# Altium PCB diapers.PcbDoc
Units mm, origin at the board's own origin, x right, y up, seen from the top; angles counter-clockwise.
Board outline 53 x 32 mm, 2 copper layers (Top Layer, Bottom Layer); 42 components, 32 nets, 146 pads, 92 vias.
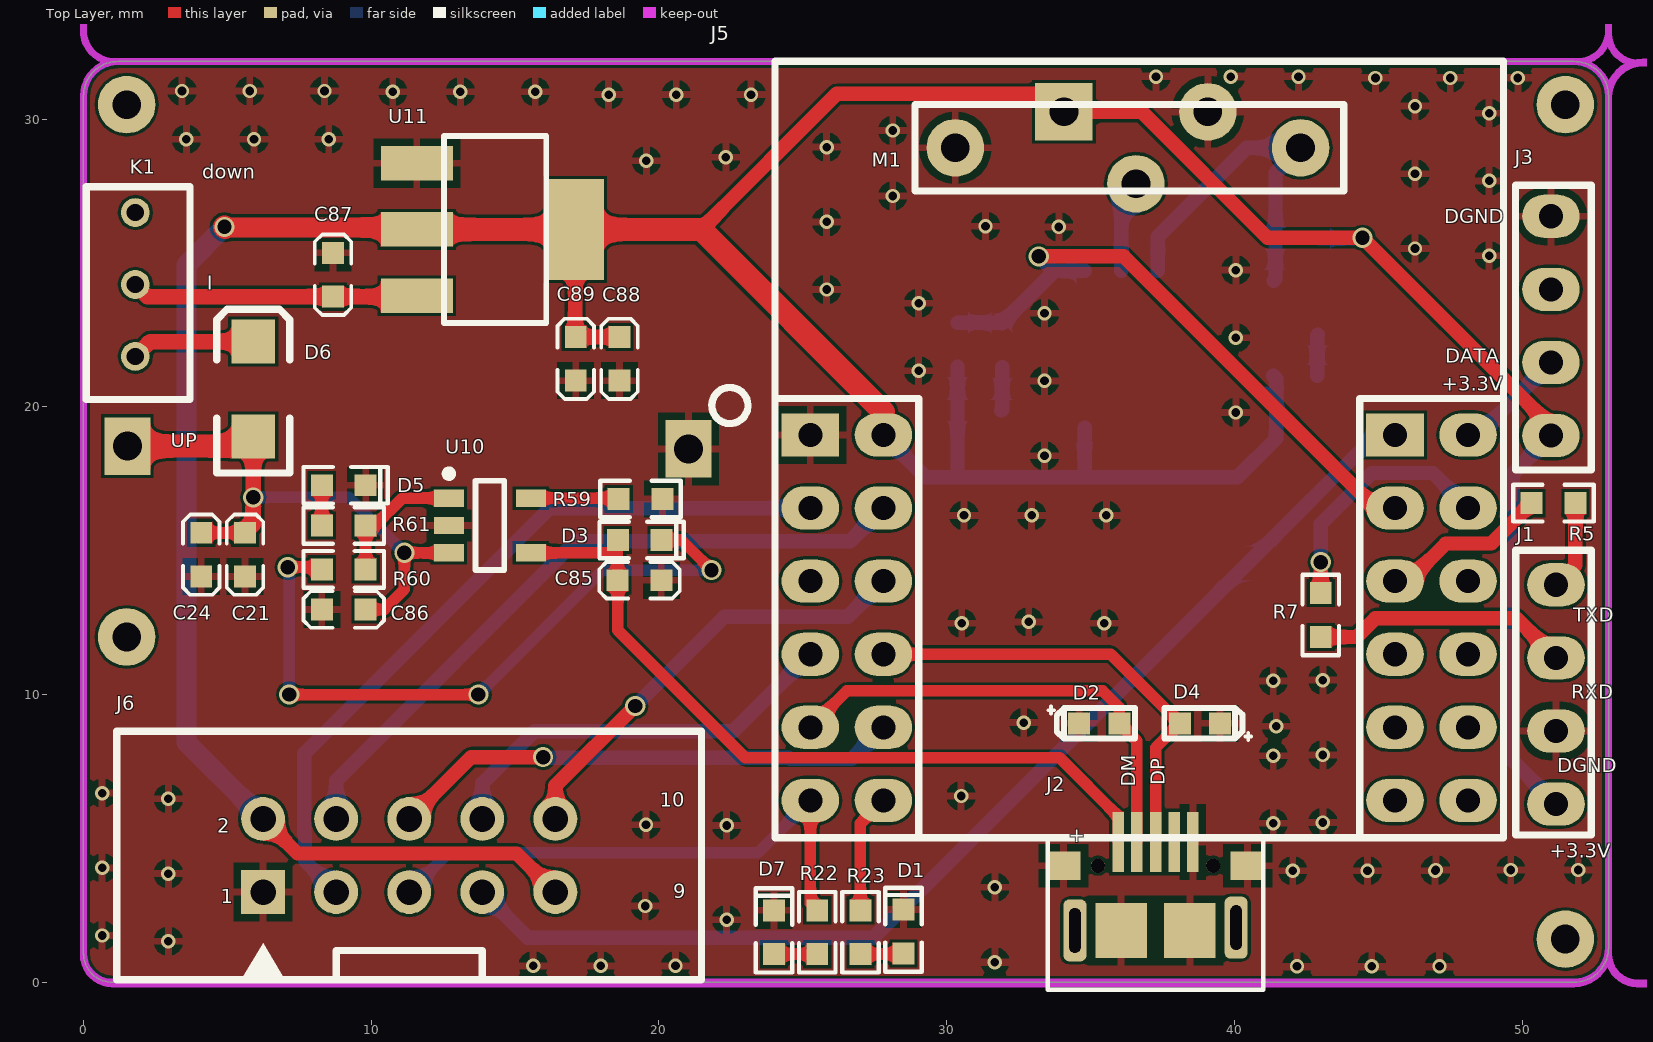
[diagram p0: Top Layer view]
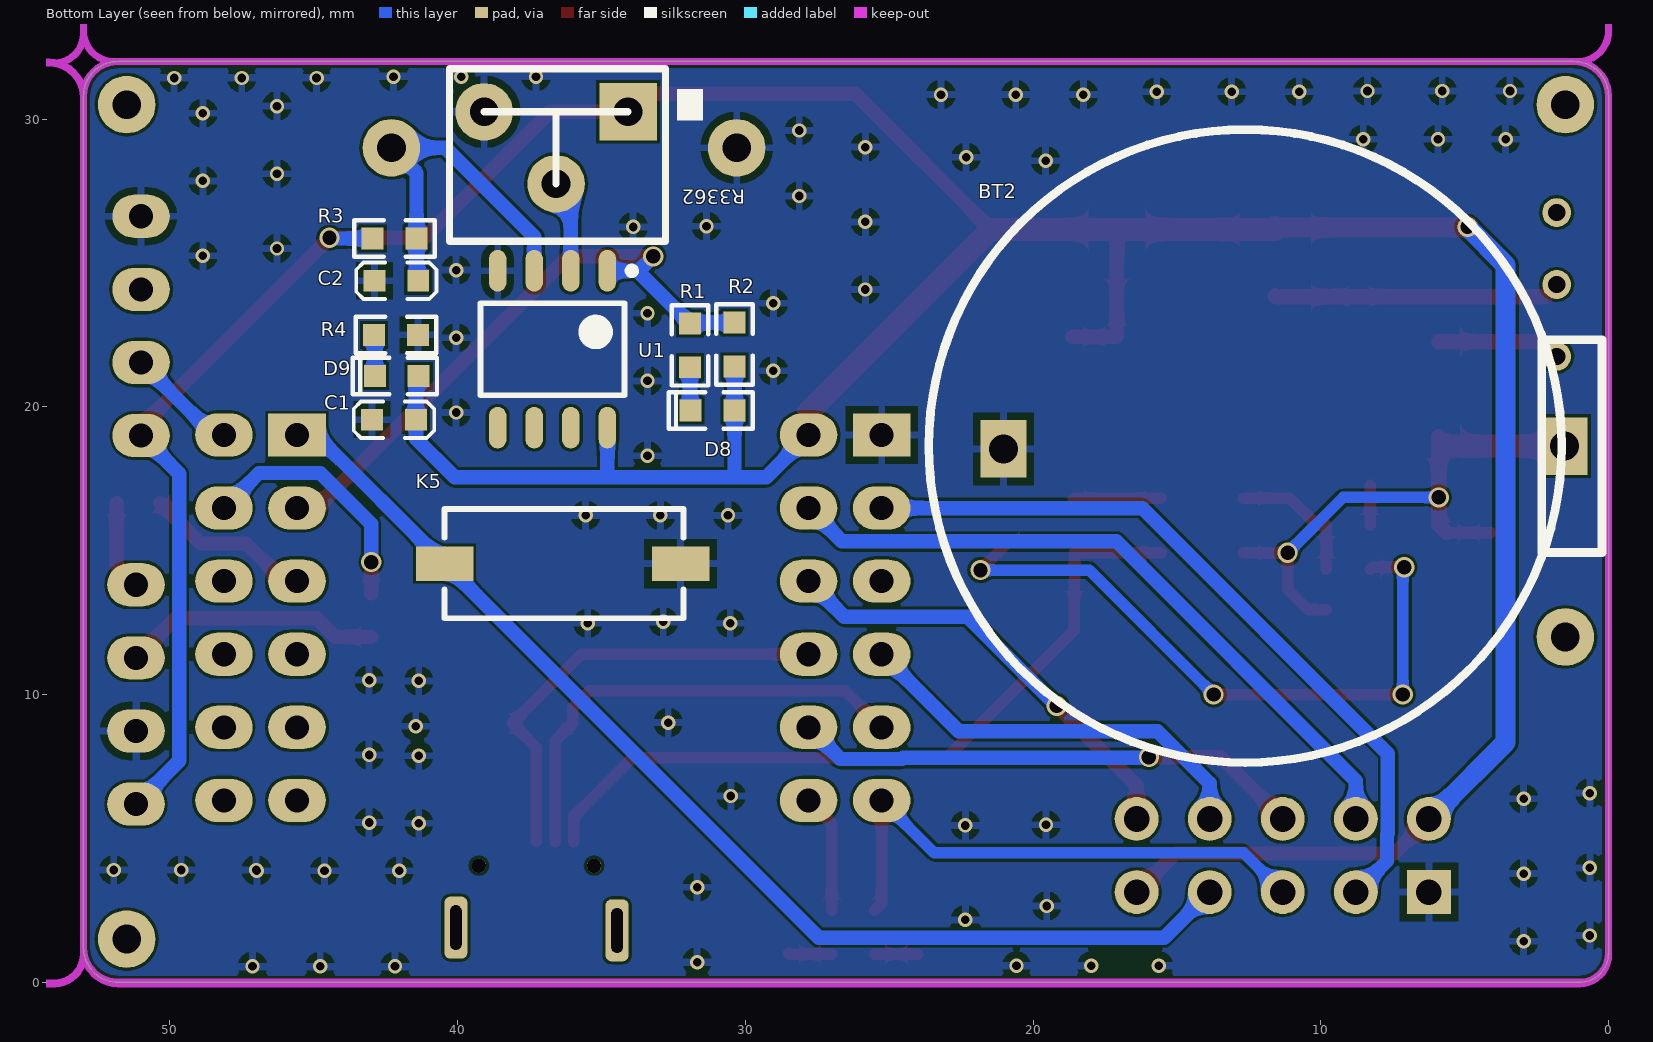
[diagram p1: Bottom Layer view, seen from below]
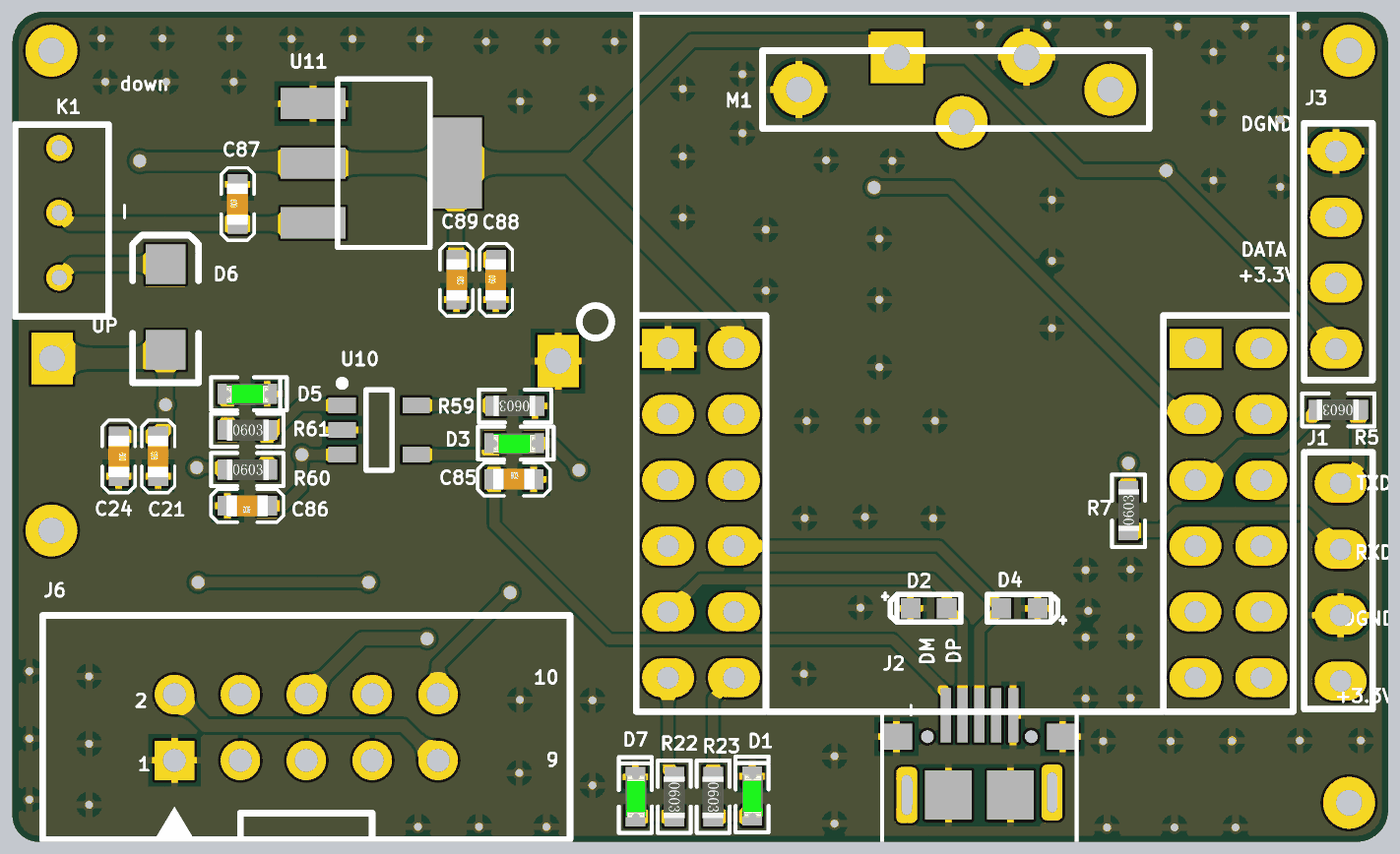
[diagram p2: 3D render of the assembled board from above, using the file's embedded part models]
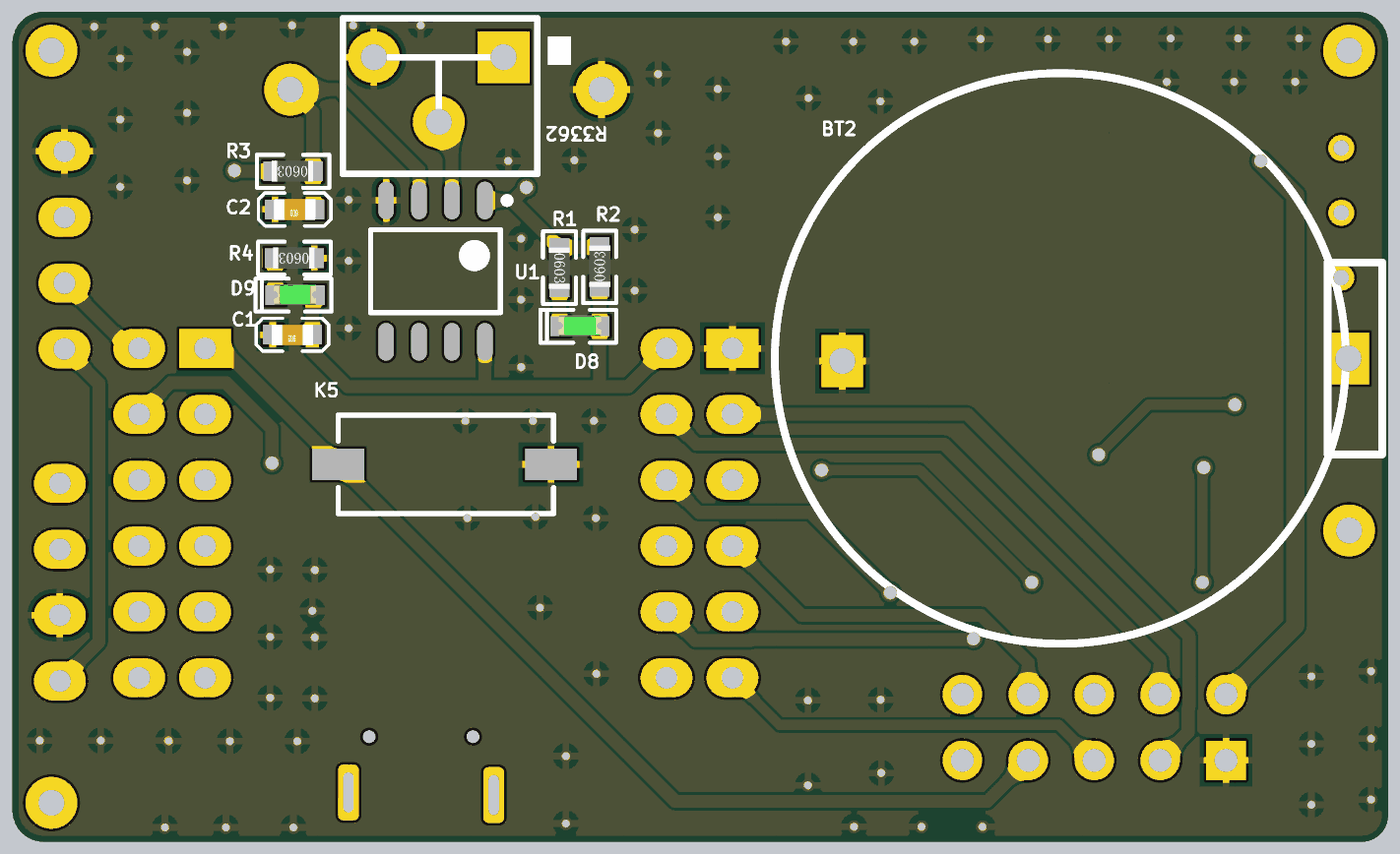
[diagram p3: 3D render of the assembled board from below, using the file's embedded part models]

## Layer stack, top to bottom
Top Solder: solder mask 0.0102, Solder Resist, Dk 3.5
Top Layer: signal copper 0.0356
Dielectric 1: dielectric 0.32, FR-4, Dk 4.8
Bottom Layer: signal copper 0.0356
Bottom Solder: solder mask 0.0102, Solder Resist, Dk 3.5

## Board outline
0,1 ccw(c1,1) 1,0 51.8,0 ccw(c51.8,1.2) 53,1.2 53,30.8 ccw(c51.8,30.8) 51.8,32 1.2,32 ccw(c1.2,30.8) 0,30.8

## Design rules (kind name [scope] priority, off if disabled: settings)
Clearance [All] p1: gap=0.1
PolygonConnect [All] p1: connectstyle=Relief reliefconductorwidth=0.254 reliefentries=4 polygonreliefangle="90 Angle" airgapwidth=0.254
RoutingVias [All] p1: holewidth=0.3 width=0.5 viastyle="Through Hole" minholewidth=0.3 minwidth=0.5 maxholewidth=0.5 maxwidth=0.7
SolderMaskExpansion [All] p1: expansion=0.102
Width [All] p1: maxlimit=10 minlimit=0.1 preferedwidth=0.5
30 further rules are at their usual default settings.

## Components (designator, comment, footprint, x,y, rotation, side; value= is the part's Value field where it differs from the comment)
BT2 "Li-battery" LIR2032 1.525,18.634 r90 bottom
C1 "104K50V" C0603 41.45,19.55 r0 bottom
C2 "104K50V" C0603 41.365,24.38 r0 bottom
C21 "104K50V" C0603 5.616,14.097 r90 top
C24 "106K50V" C0603 4.092,15.621 r270 top
C85 "475K16V" C0603 18.557,13.97 r0 top
C86 "106K50V" C0603 9.807,12.954 r180 top
C87 "104K50V" C0603 8.675,23.826 r90 top
C88 "106K50V" C0603 18.631,20.906 r90 top
C89 "104K50V" C0603 17.107,22.43 r270 top
D1 "LED0603G" D-LED0603G 28.5,1 r90 top
D2 "ESDA_TR1/0603" HS_0603D 35.301,9 r0 top
D3 "LED0603G" D-LED0603G 18.57,15.367 r0 top
D4 "ESDA_TR1/0603" HS_0603D 38.801,9 r180 top
D5 "LED0603G" D-LED0603G 8.283,17.272 r0 top
D6 "500mA/13.2V" D1206 5.9,18.966 r90 top
D7 "LED0603G" D-LED0603G 24,0.976 r90 top
D8 "LED0603G" D-LED0603G 30.375,19.875 r0 bottom
D9 "LED0603G" D-LED0603G 41.35,21.075 r0 bottom
J1 "J-D2.45-1*4" D2.54-1*4P 51.175,13.815 r270 top
J2 "USB-MINI-SOCKET" "MICRO-USB - 5.9" 35.957,4.875 r0 top
J3 "J-D2.45-1*4" D2.54-1*4P 51,19 r90 top
J5 "CC2540" CC2540 24.03,5.02 r0 top
J6 "DC3-2.54-2X5P" DC3-2.54-2X5P 6.24,3.135 r0 top
K1 "SS-12D00" SS-12D00 1.8,26.75 r270 top
K5 "3*6*5" S-K3*6 40.45,14.55 r90 bottom
M1 "SW420" SW420 42.3,29 r180 top
R1 "1KF" R0603 31.925,22.899 r270 bottom
R2 "10KF" R0603 30.375,21.401 r90 bottom
R3 "10KF" R0603 41.425,25.85 r0 bottom
R4 "1KF" R0603 41.375,22.5 r0 bottom
R5 "22RF" R0603 51.85,16.65 r180 top
R7 "22RF" R0603 43,12 r90 top
R22 "3KF" R0603 25.5,2.5 r270 top
R23 "3KF" R0603 27,2.5 r270 top
R59 "R0603-15KF" R0603 20.124,16.8 r180 top
R60 "470RF" R0603 8.283,14.351 r0 top
R61 "470RF" R0603 8.283,15.875 r0 top
R3362 "10k" R3326P 32.775,31.75 r0 bottom
U1 "LM393-DR" LM393 36.7,22 r270 bottom
U10 "MCP73831" SOT23-5N 14.125,15.875 r0 top
U11 "AMS1117_3.3V" SOT-223 11.585,26.162 r270 top

## Footprints (in the part's own frame and the unit in brackets; to place one, negate y for a bottom-side part, rotate by r counter-clockwise, add the part's x,y. Pads: shape width x height; smd on the part's side, far side on the other; paste and mask are expansions set on the pad)
C0603 [mil]
  rect 30x30 smd: 1(0,0) 2(60,0)
  silkscreen extent -25,-25 85,25, body extent -1,-15 61,16, height 12
CC2540 [mm]
  rect 2x1.5 hole 0.838: 1(1.23,14) 13(21.55,14)
  oval 2x1.5 hole 0.838: 2(3.77,14) 3(1.23,11.46) 4(3.77,11.46) 5(1.23,8.92) 6(3.77,8.92) 7(1.23,6.38) 8(3.77,6.38) 9(1.23,3.84) 10(3.77,3.84) 11(1.23,1.3) 12(3.77,1.3) 14(24.09,14) 15(21.55,11.46) 16(24.09,11.46) 17(21.55,8.92) 18(24.09,8.92) 19(21.55,6.38) 20(24.09,6.38) 21(21.55,3.84) 22(24.09,3.84) 23(21.55,1.3) 24(24.09,1.3)
  silkscreen extent -2.19,0 25.32,26.99, body extent 0,0 25.4,15.27, height 10
D2.54-1*4P [mm] "Bluetooth"
  oval 1.5x2 hole 0.838: 1(0,0) 2(2.54,0) 3(5.08,0) 4(7.62,0)
  silkscreen extent -1.2,-1.4 8.7,1.23, body extent -1.1,-1.4 8.7,1.23, height 10
D1206 [mil]
  rect 60x60 smd: 1(0,0) 2(130,0)
  silkscreen extent -50,-50 174,50, body extent -22,-40 151,40, height 47
D-LED0603G [mil]
  rect 30x30 smd: 1(0,0) 2(60,0)
  silkscreen extent -25,-25 90,25, body extent -2,-16 62,15, height 24
DC3-2.54-2X5P [mil] "DC3-2.54-2x5P直脚"
  rect 60x60 hole 35: 1(0,0)
  round 60 hole 35: 2(0,100) 3(100,0) 4(100,100) 5(200,0) 6(200,100) 7(300,0) 8(300,100) 9(400,0) 10(400,100)
  silkscreen extent -200,-120 600,220
HS_0603D [mil]
  rect 30x30 smd: 1(-27.5,0) 2(27.5,0)
  silkscreen extent -70,-21 49,23
LIR2032 [mm] "LIR2032 -- 2 Pin"
  rect 2x1.6 hole 1: 1(0,0) 2(-0.1,19.5)
  silkscreen extent -11,-1.3 11,22.1
LM393 [mm] "SOP, 8-Leads, Body 4.90x3.90mm, Pitch 1.27mm, IPC Medium Density"
  oval 1.45x0.6 smd: 1(-2.725,1.905) 2(-2.725,0.635) 3(-2.725,-0.635) 4(-2.725,-1.905) 5(2.725,-1.905) 6(2.725,-0.635) 7(2.725,0.635) 8(2.725,1.905)
  silkscreen extent -2.85,-2.5 1.6,2.88, body extent -2,-2.5 2,2.5, height 1.75
"MICRO-USB - 5.9" [mm]
  rrect50% 0.8x2.15 hole 0.4 slot 1.55 at 90 deg: 0(-1.5,-3.075) 0(4.1,-2.975)
  rect 0.4x2.1 smd: 1(0,0) 2(0.65,0) 3(1.3,0) 4(1.95,0) 5(2.6,0)
  rect 1.2x1 smd: 6(-1.9,-0.825) 7(4.5,-0.825)
  rect 1.8x1.9 smd: 8(0.106,-3.075) 9(2.493,-3.075)
  round 0.5 hole 0.5 unplated: ""(-0.7,-0.825) ""(3.3,-0.825)
  silkscreen extent -2.45,-5.13 5.05,0.12
R0603 [mil]
  rect 30x30 smd: 1(0,0) 2(60,0)
  silkscreen extent -25,-25 85,25, body extent 0,-16 62,15, height 18
R3326P [mm] "电位器精密可调电阻"
  rect 2x2 hole 1: 1(1.3,1.5)
  round 2 hole 1: 2(3.8,4) 3(6.3,1.5)
  silkscreen extent -1.3,0 7.5,6
S-K3*6 [mm]
  rect 1.2x2 smd: 1(0,0) 2(0,-8.2)
  silkscreen extent -1.9,-8.3 1.9,0
SOT23-5N [mm] "SOT23, 5-Leads, Body 2.90x2.70mm, Pitch 0.95mm, IPC Medium Density"
  rect 1.05x0.6 smd: 1(-1.425,0.95) 2(-1.425,0) 3(-1.425,-0.95) 4(1.425,-0.95) 5(1.425,0.95)
  silkscreen extent -1.55,-1.55 0.5,1.92, body extent -0.9,-1.55 0.9,1.55, height 1.45
SOT-223 [mm]
  rect 1.2x2.5 smd: 1(-2.3,0) 2(0,0) 3(2.3,0)
  rect 3.5x2 smd: 2(0,5.5)
  silkscreen extent -3.25,0.94 3.25,4.5
SS-12D00 [mm] "SS-12D00(1P2T) 立式 柄高5MM"
  round 1 hole 0.6: 1(0,0) 2(2.5,0) 3(5,0)
  silkscreen extent -0.9,-1.7 6.5,1.9
SW420 [mm] "常闭型 振动开关SW-420 高灵敏震动开关2708全方位感应传感器"
  round 2 hole 1: 1(0,0) 2(12,0)
  silkscreen extent -1.5,-1.5 13.4,1.5

## Part data
BT2: library part Li-batttery, "纽扣电池LIR2023"
C1 C2 C21 C87 C89: library part C0603X7R-104K50V, "贴片电容-陶瓷"
C24 C86 C88: library part C0603X7R-106K50V, "贴片电容-陶瓷"
C85: library part C0603X7R-475K16V, "贴片电容-陶瓷"
D1 D3 D5 D7 D8 D9: library part DLED-0603-G, "贴片二极管-LED"
D2 D4: library part "D Zener", "Zener Diode"
D6: library part 1206MSD, "500mA/13.2V 自恢复保险丝"
J1 J3: library part J-D2.54-1*4单排排母
J2: library part J-USB-MINI-SOCKET, "USB-A卧式插座"
J5: "蓝牙主控模块的接口"
J6: library part J-DC3-2.54-2X5P, "简牛插座-直针"
K1: library part "SS-12D00(1P2T) 立式 柄高5MM"
K5: "贴片-卧式轻触开关"
M1: "长闭震动开关"
R1 R4: library part R0603-1KF, "贴片电阻-通用"
R2 R3: library part R0603-10KF, "贴片电阻-通用"
R5 R7: library part R0603-22RF, "贴片电阻-通用"
R22 R23: library part R0603-3KF, "贴片电阻-通用"
R59: "贴片电容-通用"
R60 R61: library part R0603-470RF, "贴片电阻-通用"
R3362: library part R3362-10K, "电位器精密可调电阻"
U1: "双路比较器"
U10: "charge IC"
U11: library part AMS1117-3.3V

## Free pads (board coordinates)
  round 2 hole 1: 2(1.5,30.5) 3(1.5,12) 4(51.5,1.5) 5(51.5,30.5)

## Via types
v1: diameter 0.5, hole 0.3, Top Layer to Bottom Layer, tented both sides, 80 vias
v2: diameter 0.7, hole 0.5, Top Layer to Bottom Layer, tented both sides, 12 vias

## Nets (pads, with @x,y where several pads share a name; then routed paths per layer and width w, separated by ;. In a path a pad name is that pad's centre, name@x,y a point inside that pad or via, vN(x,y) a via of type N, cw(c..) or ccw(c..) an arc to the next point about the centre after c; other vN are vias at no path point)
+3.3V: C1.1 C88.2 C89.1 D8.1 D9.1 J1.4 J3.1 J5.2 J6.2 J6.9 R2.1 R3.2 R3362.1 U1.8 U11.2 | length 140.1
  Top Layer w0.5: J6.2 7.44,4.475 15.06,4.475 J6.9 ; U11.2@17.085,26.162 17.085,22.452 C89.1 C88.2 ; 21.463,26.162 26.176,30.875 34.075,30.875 R3362.1 36.775,30.25 41.15,25.875 v2(44.45,25.875) 51,19.325 J3.1
  Top Layer w0.7: v2@4.919,26.231 U11.2@11.585,26.231
  Top Layer w0.8: v2(4.9,26.25) v2@4.919,26.231 ; U11.2@11.585,26.231 11.585,26.162 17.085,26.162 21.463,26.162 27.8,19.825 J5.2
  Bottom Layer w0.5: J5.2 29.27,17.55 30.475,17.55 ; R2.1 D8.1 30.375,17.65 30.475,17.55 ; U1.8 34.795,17.705 34.95,17.55 ; D9.1 41.45,20.975 C1.1 41.45,18.9 40.1,17.55 34.95,17.55 ; R3.2 44.425,25.85 v2(44.45,25.875) ; J3.1 49.675,17.675 49.675,7.695 J1.4 ; 30.475,17.55 34.95,17.55
  Bottom Layer w0.7: v2(4.9,26.25) 3.575,24.925 3.575,8.34 5.875,6.04 J6.2@5.875,5.675
/CS: J5.11 J6.5 R22.1 | length 19.2
  Top Layer w0.4: J5.11 25.26,2.74 R22.1
  Bottom Layer w0.4: J6.5 12.685,4.5 23.44,4.5 J5.11
BT2: BT2.1 C21.2 C24.1 C86.1 D6.1 U10.3 | length 20
  Top Layer w0.4: C24.1 C21.2 C21.2@5.625,15.63 ; D6.1@5.625,18.691 D6.1 ; C86.1 10.454,12.954 11.15,13.65 v2(11.15,14.925) U10.3
  Top Layer w0.54: C21.2@5.625,15.63 5.9,15.905 v2(5.9,16.85) D6.1
  Top Layer w0.8: BT2.1 5.568,18.634 D6.1@5.625,18.691
  Bottom Layer w0.4: v2(5.9,16.85) 9.225,16.85 v2(11.15,14.925)
D0: J5.15 R1.1 R2.2 U1.1 | length 21.9
  Top Layer w0.5: v2(33.2,25.225) 36.15,25.225 44.895,16.48 J5.15
  Bottom Layer w0.5: R2.2 31.899,22.925 R1.1 33.751,24.725 ; v2(33.2,25.225) 33.7,24.725 33.751,24.725 ; U1.1 33.751,24.725
DATA: J3.2 J5.14 | length 3.9
  Bottom Layer w0.5: J5.14 48.48,19.02 J3.2
DBG_DC: J5.3 J6.3 | length 26.4
  Bottom Layer w0.5: J6.3 7.7,4.215 7.7,5.15 7.668,5.182 7.668,7.943 16.205,16.48 J5.3
DBG_DD: J5.4 J6.4 | length 24.3
  Bottom Layer w0.5: J6.4 8.78,7.005 17.1,15.325 26.645,15.325 J5.4
DGND: BT2.2 C1.2 C2.2 C21.1 C24.2 C85.2 C86.2 C87.2 C88.1 C89.2 D1.2 D2.1 D4.1 D5.2 D7.2 J1.3 J2.5 J2.6 J2.7 J2.8 J2.9 J3.4 J5.1 J6.1 K5.2 M1.2 R4.1 R59.1 R3362.3 U1.4 U10.2 U11.1
  other v1: 42.175,0.55 44.775,0.55 47.125,0.55 15.625,0.575 17.975,0.575 20.575,0.575 31.675,0.7 2.95,1.425 0.65,1.625 22.35,2.175 19.525,2.65 31.675,3.3 2.95,3.775 42.025,3.875 44.625,3.875 46.975,3.875 47,3.9 49.6,3.9 51.95,3.9 0.65,3.975 19.55,5.475 22.35,5.45 41.35,5.525 43.075,5.55 2.95,6.375 30.5,6.475 0.65,6.575 41.35,7.875 43.075,7.9 41.45,8.9 32.675,9.025 41.35,10.475 43.075,10.5 30.525,12.475 35.475,12.475 32.85,12.525 30.6,16.225 32.95,16.225 35.55,16.225 33.4,18.3 40.05,19.8 33.4,20.9 29.025,21.25 40.05,22.4 33.4,23.25 29.025,23.6 25.825,24.075 40.05,24.75 48.85,25.25 46.275,25.5 33.9,26.25 31.35,26.275 25.825,26.425 28.125,27.325 48.85,27.85 46.275,28.1 19.561,28.548 22.325,28.675 25.825,29.025 3.575,29.3 5.925,29.3 8.525,29.3 28.125,29.6 48.85,30.2 46.275,30.45 18.25,30.85 20.6,30.85 23.2,30.85 10.75,30.95 13.1,30.95 15.7,30.95 3.425,30.975 5.775,30.975 8.375,30.975 44.9,31.425 47.5,31.425 49.85,31.425 37.275,31.475 39.875,31.475 42.225,31.475
DIN: J5.7 J6.8 | length 14.5
  Bottom Layer w0.5: J6.8 13.86,6.91 15.675,8.725 22.585,8.725 J5.7
DM: D2.2 J2.2 J5.9 | length 16.4
  Top Layer w0.4: J5.9 26.525,10.125 35.425,10.125 36,9.55 D2.2 36.607,8.393 J2.2
DOUT: J5.6 J6.10 | length 15.5
  Top Layer w0.5: J6.10 16.4,6.825 v2(19.175,9.6) v2@19.175,9.575
  Bottom Layer w0.5: v2(19.175,9.6) 22.275,12.7 26.56,12.7 J5.6
DP: D4.2 J2.3 J5.8 | length 15.8
  Top Layer w0.4: J5.8 35.703,11.4 D4.2 37.257,8.154 J2.3
NetC2_1: C2.1 M1.1 R3.1 U1.3 | length 12.4
  Bottom Layer w0.5: U1.3 37.335,25.91 40.425,29 M1.1 41.425,28.125 R3.1 41.425,24.44 C2.1
NetD1_1: D1.1 R23.2 | length 1.5
  Top Layer w0.4: R23.2 28.476,0.976 D1.1
NetD3_2: D3.2 R60.1 | length 24.3
  Top Layer w0.4: v2(7.1,14.425) 8.209,14.425 R60.1 ; v2(7.15,10) v2(13.725,10) ; D3.2 20.783,15.367 v2(21.825,14.325)
  Bottom Layer w0.4: v2(7.1,14.425) 7.15,14.375 v2(7.15,10) ; v2(13.725,10) 18.05,14.325 v2(21.825,14.325)
NetD5_1: D5.1 R61.1 | length 1.4
  Top Layer w0.4: R61.1 D5.1
NetD6_2: D6.2 K1.3 | length 4.3
  Top Layer w0.54: K1.3 2.318,22.268 D6.2
NetD7_1: D7.1 R22.2 | length 1.5
  Top Layer w0.4: D7.1 R22.2
NetD8_2: D8.2 R1.2 | length 1.5
  Bottom Layer w0.5: D8.2 31.925,19.901 R1.2
NetD9_2: D9.2 R4.2 | length 1.4
  Bottom Layer w0.5: D9.2 42.874,22.475 R4.2
NetJ1_1: J1.1 R5.1 | length 3.1
  Top Layer w0.5: J1.1 51.85,14.49 R5.1
NetJ1_2: J1.2 R7.1 | length 9
  Top Layer w0.5: R7.1 44.25,12 44.9,12.65 49.8,12.65 J1.2
NetR59_2: R59.2 U10.5 | length 3.1
  Top Layer w0.4: U10.5 18.575,16.825 R59.2
NetR60_2: R60.2 R61.2 U10.1 | length 4.8
  Top Layer w0.4: R60.2 R61.2 10.125,15.875 11.075,16.825 U10.1
NetR3362_2: R3362.2 U1.2 | length 3.2
  Bottom Layer w0.5: U1.2 36.065,27.24 R3362.2
P13: J5.12 R23.1 | length 4.2
  Top Layer w0.4: R23.1 27,5.52 J5.12
RST: J5.13 J6.7 K5.1 | length 39.6
  Bottom Layer w0.5: J6.7 15.445,1.55 27.45,1.55 K5.1 44.92,19.02 J5.13
RXD: J5.16 R7.2 | length 8.8
  Top Layer w0.5: R7.2 v2(43,14.6)
  Bottom Layer w0.5: v2(43,14.6) 43,15.925 44.775,17.7 46.9,17.7 J5.16
SCLK: J5.10 J6.6 | length 17.9
  Top Layer w0.5: J6.6 13.47,7.825 v2(15.975,7.825)
  Bottom Layer w0.5: v2(15.975,7.825) 16,7.8 24.514,7.8 24.554,7.76 26.7,7.76 J5.10
TXD: J5.17 R5.2 | length 5.9
  Top Layer w0.5: J5.17 46.04,13.94 47.35,15.25 48.926,15.25 R5.2
VBUS: C85.1 D3.1 J2.1 U10.4 | length 26.7
  Top Layer w0.4: U10.4 18.532,14.925 18.557,14.95 C85.1 ; C85.1@18.57,13.97 18.57,12.23 23,7.8 33.925,7.8 35.957,5.768 J2.1
VIN: C87.1 K1.2 U11.3 | length 10
  Top Layer w0.54: K1.2 2.224,23.826 C87.1 11.549,23.826 U11.3
pads on no net: J2. J2.0 J2.4 J3.3 J5.5 J5.18 J5.19 J5.20 J5.21 J5.22 J5.23 J5.24 K1.1 U1.5 U1.6 U1.7

## Polygon pours and split planes (outlines as drawn)
DGND on Top Layer "gnd1" (solid, pour order 0): 0,31.975 0,0 52.975,0 52.975,31.9 52.9,31.975 0,31.975
DGND on Bottom Layer "gnd" (solid, pour order 2): 0,32 0,0 52.925,0 52.95,0.025 52.95,31.95 52.975,31.975 0.025,31.975 0,32

## Keep-outs
Keep-Out Layer:
  lines w0.25: 0,30.75 0,0.95 ccw(c1,0.95) 1,-0.05 51.8,-0.05 ccw(c51.8,1.15) 53,1.15 53,30.75 ; 0,32.975 0,62.775 cw(c1.2,62.775) 1.2,63.975 51.8,63.975 ; 53,33.15 53,62.75 ; 53,33.175 53,62.775 ccw(c51.8,62.775) 51.8,63.975 ; 0,0.975 ccw(c1,0.975) 1,-0.025 ; 0,0.975 ccw(c1,0.975) 1,-0.025 ; 0,0.975 0,30.775 0,0.975 ; 1,-0.025 51.8,-0.025 ; 1,-0.025 51.8,-0.025 ; 1.2,32 cw(c1.075,33.075) 0,32.95 0,62.75 cw(c1.2,62.75) 1.2,63.95 51.8,63.95 ; 1.2,32 ccw(c1.2,30.8) 0,30.8 0,1 ccw(c1,1) 1,0 51.8,0 ccw(c51.8,1.2) 53,1.2 53,30.8 ccw(c51.8,30.8) 51.8,32 ; 1.2,32 51.8,32 ; 51.8,-0.025 ccw(c51.8,1.175) 53,1.175 ; 51.8,-0.025 ccw(c51.8,1.175) 53,1.175 ; 51.8,32 ccw(c51.925,33.075) 53,32.95 ; 51.8,63.95 ccw(c51.8,65.15) 53,65.15 53,94.75 ; 51.8,63.95 cw(c51.8,62.75) 53,62.75 ; 51.8,63.95 1,63.95 cw(c1,64.95) 0,64.95 0,94.75 cw(c1.2,94.75) 1.2,95.95 51.8,95.95 cw(c51.8,94.75) 53,94.75 ; 51.8,63.975 ccw(c51.8,65.175) 53,65.175 53,94.775 ccw(c51.8,94.775) 51.8,95.975 1.2,95.975 ccw(c1.2,94.775) 0,94.775 0,64.975 ccw(c1,64.975) 1,63.975 51.8,63.975 ; 53,1.175 53,30.775 ; 53,1.175 53,30.775 ; 53,30.75 cw(c54.2,30.75) 54.2,31.95 104.8,31.95 ; 53,30.75 53,0.95 ccw(c54,0.95) 54,-0.05 104.8,-0.05 ccw(c104.8,1.15) 106,1.15 106,30.75 ccw(c104.8,30.75) 104.8,31.95 ; 53,30.775 cw(c54.2,30.775) 54.2,31.975 104.8,31.975 cw(c104.8,30.775) 106,30.775 106,1.175 cw(c104.8,1.175) 104.8,-0.025 54,-0.025 cw(c54,0.975) 53,0.975 53,30.775 ; 53,32.95 ccw(c54,32.95) 54,31.95 104.8,31.95 ; 53,32.95 53,62.75 ; 53,62.75 cw(c54.2,62.75) 54.2,63.95 104.8,63.95 ; 53,94.75 cw(c54.2,94.75) 54.2,95.95 104.8,95.95 cw(c104.8,94.75) 106,94.75 106,65.15 cw(c104.8,65.15) 104.8,63.95 ; 53,94.75 53,64.95 ccw(c54,64.95) 54,63.95 104.8,63.95 ; 104.8,31.95 ccw(c104.8,33.15) 106,33.15 106,62.75 ccw(c104.8,62.75) 104.8,63.95

## Silkscreen, mask and mechanical layers (free items; w line width, h text height)
Top Overlay:
  text "down" at 4.125,27.925 h0.5
  text "DGND" at 47.3,26.375 h0.5
  text "DATA" at 47.325,21.525 h0.5
  text "+3.3V" at 47.2,20.55 h0.5
  text "UP" at 3.025,18.6 h0.5
  text "TXD" at 51.775,12.525 h0.5
  text "RXD" at 51.7,9.85 h0.5
  text "DGND" at 51.225,7.3 h0.5
  text "DP" at 37.575,6.85 h0.5 r90
  text "DM" at 36.55,6.8 h0.5 r90
  text "+3.3V" at 50.95,4.325 h0.5

## Dimensions
0,0.975 to 53,1.175 on Keep-Out Layer
0,0.95 to 53,1.15 on Keep-Out Layer
0,0.975 to 53,1.175 on Keep-Out Layer
1,0 to 1.2,32 on Keep-Out Layer
0,1 to 53,1.2 on Keep-Out Layer

## Text inside footprints (layer, text, board x,y; h text height)
J2: Top Overlay "+" at 34.243,4.873 h0.5
J6: Top Overlay "2" at 4.65,5.2 h0.5; Top Overlay "9" at 20.5,2.925 h0.5; Top Overlay "1" at 4.775,2.75 h0.5; Top Overlay "10" at 20.025,6.1 h0.5
K1: Top Overlay "I" at 4.5,24.554 h0.5 r180